# Altium PCB PCB2.PcbDoc
Units mm, origin at the board's own origin, x right, y up, seen from the top; angles counter-clockwise.
Board outline 30 x 30 mm, 2 copper layers (Top Layer, Bottom Layer); 23 components, 18 nets, 85 pads, 20 vias.
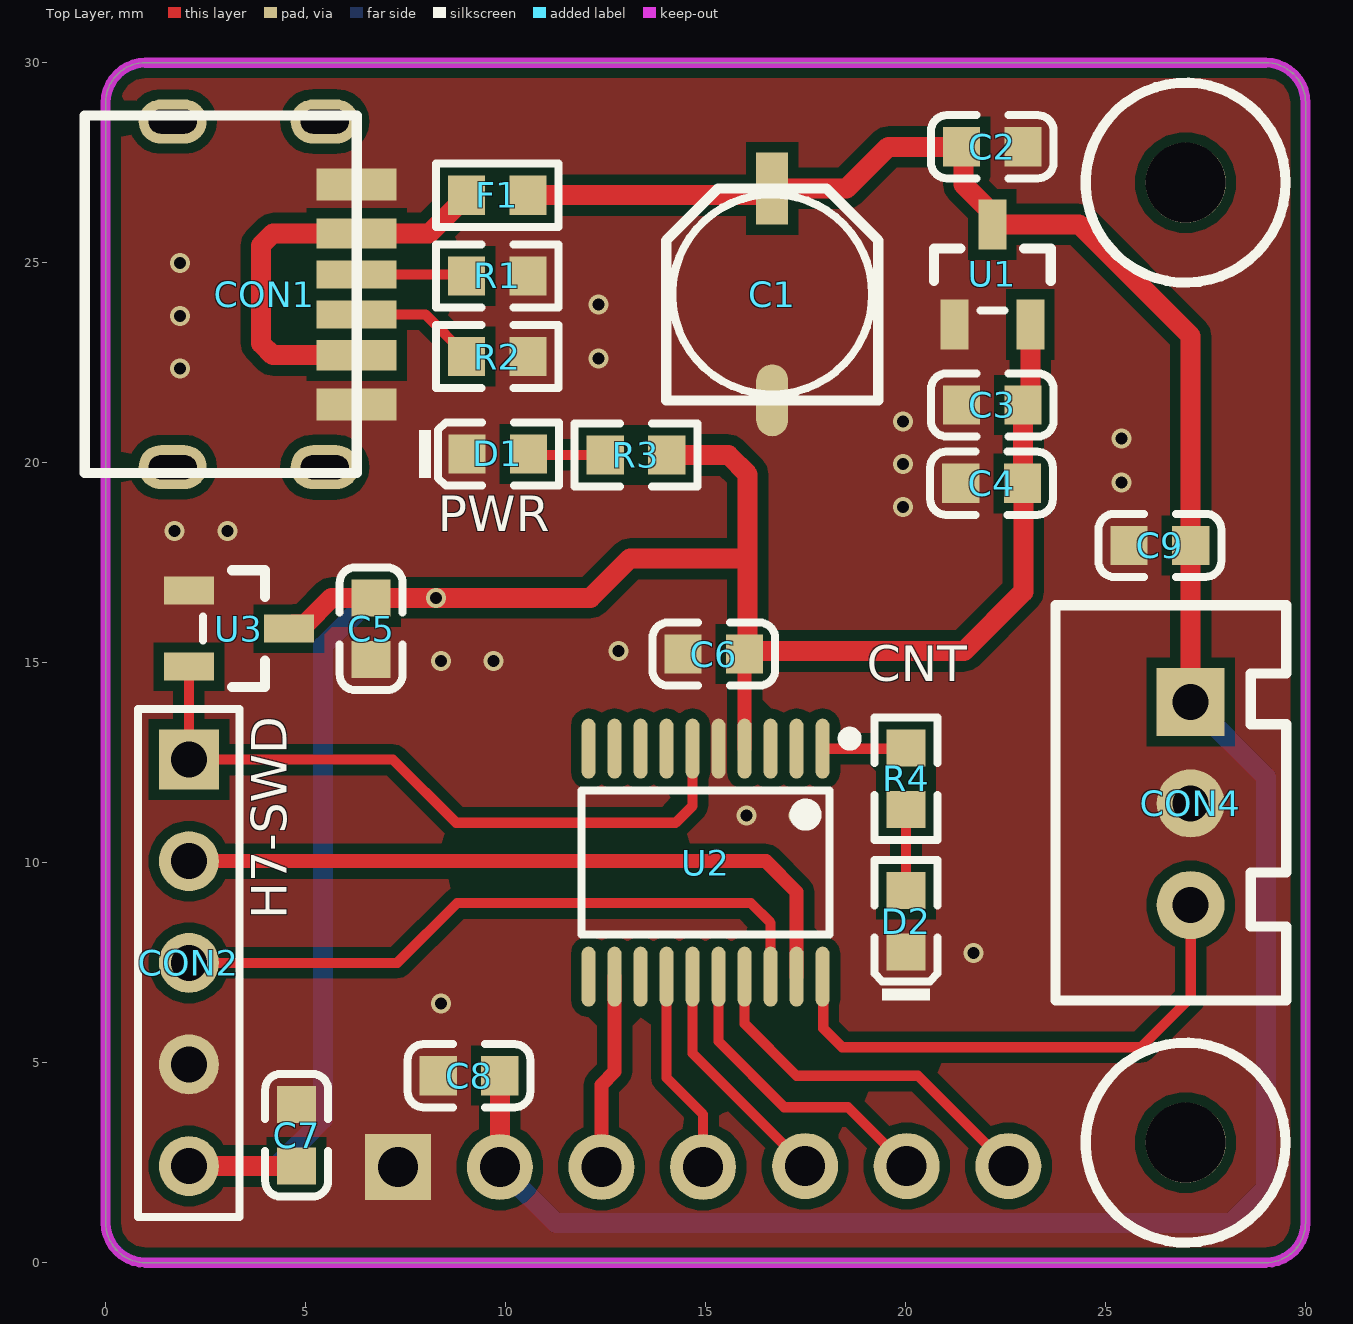
[diagram p0: Top Layer view]
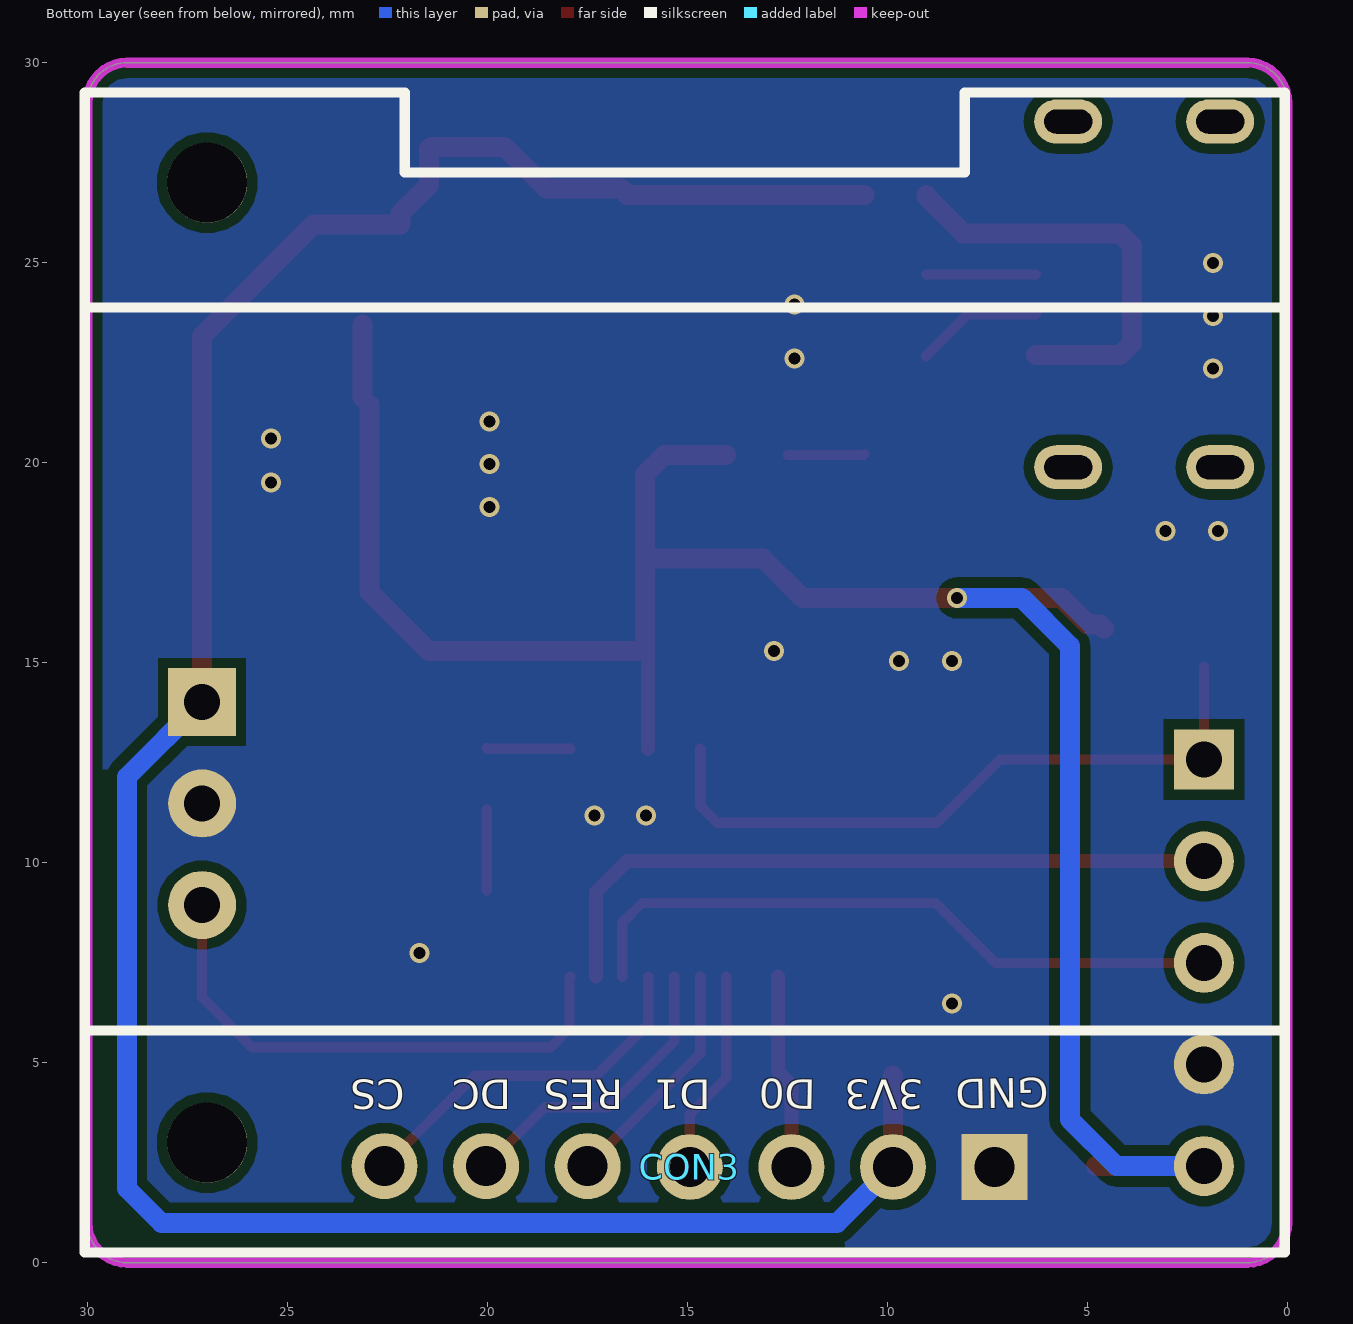
[diagram p1: Bottom Layer view, seen from below]
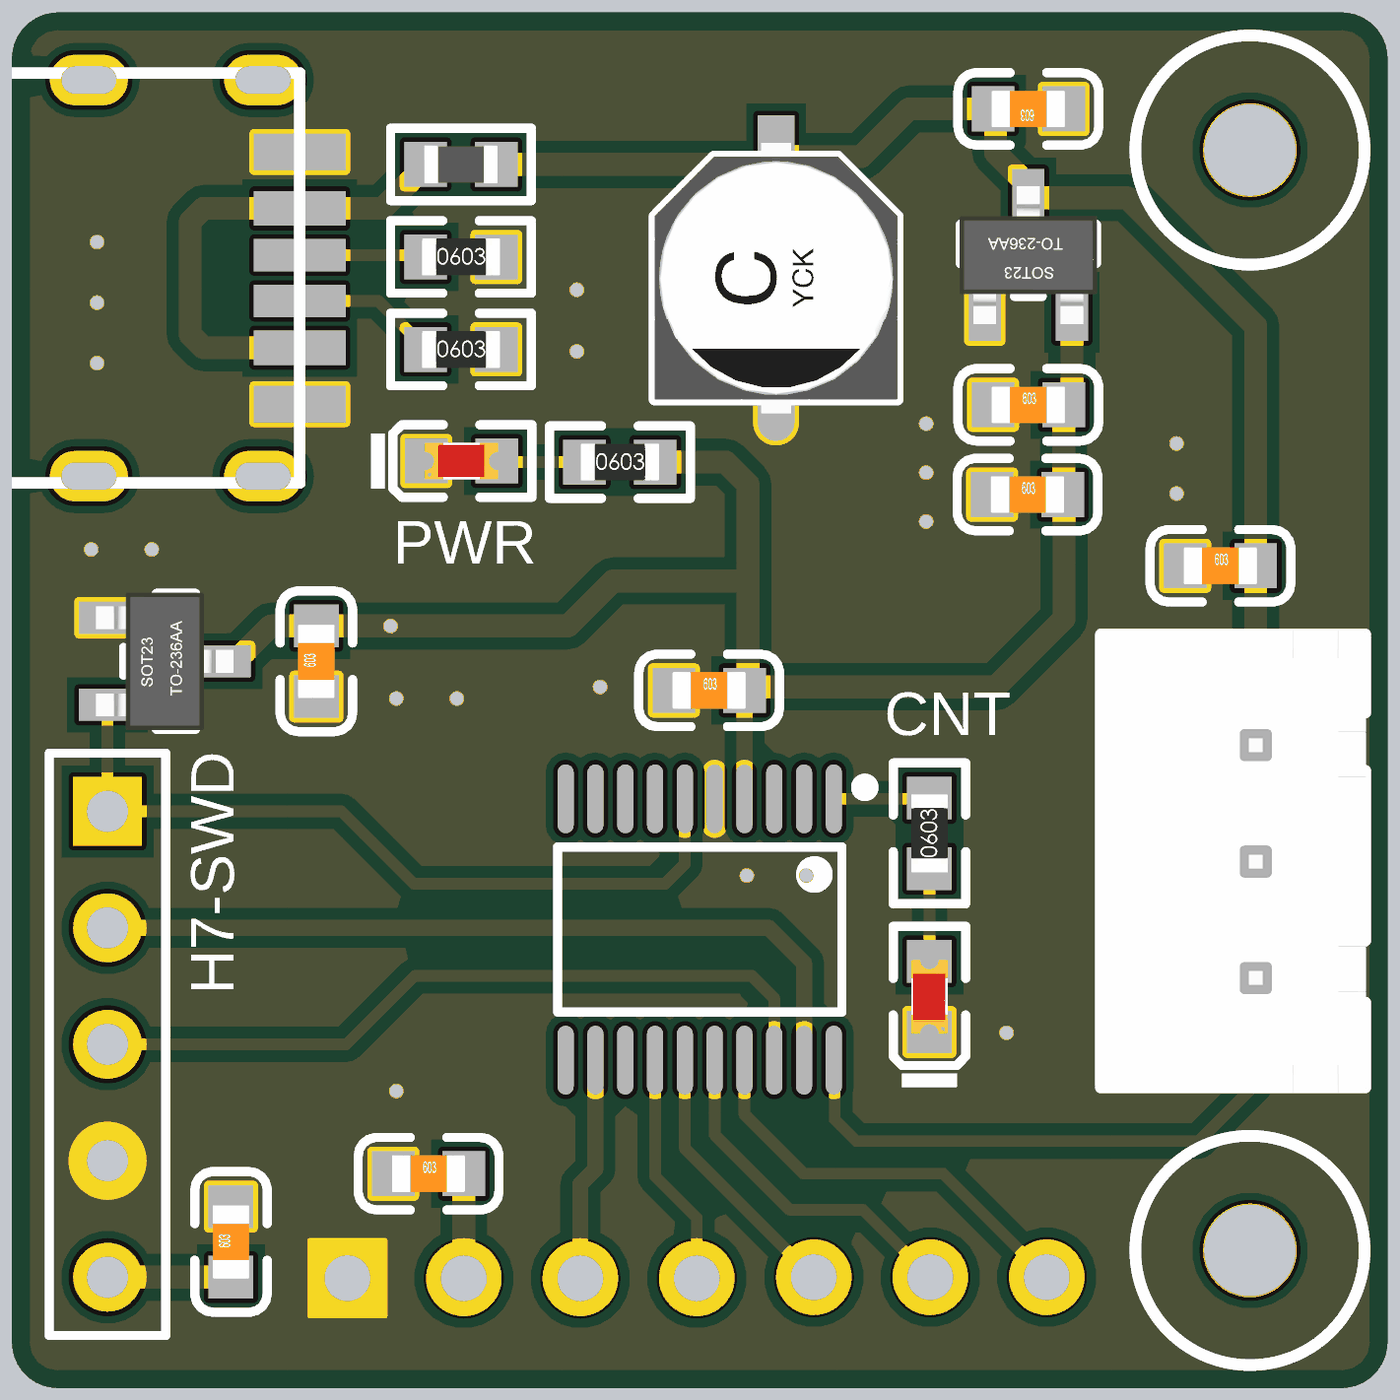
[diagram p2: 3D render of the assembled board from above, using the file's embedded part models]

## Layer stack, top to bottom
Top Solder: solder mask 0.0102, Solder Resist, Dk 3.5
Top Layer: signal copper 0.0356
Dielectric 1: dielectric 0.32, FR-4, Dk 4.8
Bottom Layer: signal copper 0.0356
Bottom Solder: solder mask 0.0102, Solder Resist, Dk 3.5

## Board outline
0,1 0,29 cw(c1,29) 1,30 29,30 cw(c29,29) 30,29 30,1 cw(c29,1) 29,0 1,0 cw(c1,1)

## Design rules (kind name [scope] priority, off if disabled: settings)
Clearance [All] p1: gap=0.254 ignorepadtopadclearanceinfootprint=FALSE except(0: Arc-Hole Track-Hole SMDPad-Hole THPad-Hole Via-Hole Fill-Hole Poly-Hole Region-Hole Text-Hole)
PolygonConnect [All] p1: connectstyle=Direct reliefconductorwidth=0.254 reliefentries=4 polygonreliefangle="90 Angle" airgapwidth=0.254
RoutingVias [All] p1: holewidth=0.711 width=1.27 viastyle="Through Hole" minholewidth=0.711 minwidth=1.27 maxholewidth=0.711 maxwidth=1.27
SolderMaskExpansion [All] p1: expansion=0.102 istentingtop=FALSE
Width [All] p1: maxlimit=1 minlimit=0.254 preferedwidth=0.254
30 further rules are at their usual default settings.

## Components (designator, comment, footprint, x,y, rotation, side; value= is the part's Value field where it differs from the comment)
C1 "Cap Pol1" "CM C(5*5.4)" 16.665,24.208 r90 top value=100uF/10V
C2 "1uF" 0603_C 22.167,27.898 r180 top
C3 "1uF" 0603_C 22.167,21.444 r0 top
C4 "0.1uF" 0603_C 22.149,19.485 r0 top
C5 "0.1uF" 0603_C 6.638,15.85 r90 top
C6 "0.1uF" 0603_C 15.205,15.215 r0 top
C7 "100nF" 0603_C 4.775,3.186 r90 top
C8 "0.1uF" 0603_C 9.085,4.674 r0 top
C9 "0.1uF" 0603_C 26.357,17.932 r0 top
CON1 "USB Type-C Charge" Type-C_4charge 6.276,24.208 r270 top
CON2 "H7-Tool SWD" hdr1x5 2.083,12.576 r270 top
CON3 "OLED 7Pin" "0.96 OLED SPI" 15.062,14.757 r0 bottom locked
CON4 "HDR1x3" XH2.54-LI-3P 27.127,11.481 r270 top
D1 "LED" 0603_LED_S1 9.804,20.218 r0 top
D2 "LED" 0603_LED_S1 20.01,8.534 r90 top
F1 "6V/0.5A" 0603_L 9.792,26.687 r0 top
R1 "5.1K" 0603_R 9.792,24.669 r0 top
R2 "5.1K" 0603_R 9.792,22.651 r0 top
R3 "10K" 0603_R 13.259,20.193 r0 top
R4 "10K" 0603_R 20.01,12.097 r90 top
U1 "SC662K-3.3V" SOT-23(SOT-23-3) 22.167,24.708 r270 top
U2 "STM32G030F6P6" TSSOP-20 15,10 r180 top
U3 "MAX809T" SOT-23(SOT-23-3) 3.333,15.85 r180 top

## Footprints (in the part's own frame and the unit in brackets; to place one, negate y for a bottom-side part, rotate by r counter-clockwise, add the part's x,y. Pads: shape width x height; smd on the part's side, far side on the other; paste and mask are expansions set on the pad)
"0.96 OLED SPI" [mm]
  rect 1.65x1.65 hole 1 paste+0 mask+0.051: 1(-7.747,12.363)
  round 1.65 hole 1 paste+0 mask+0.051: 2(-5.207,12.366) 3(-2.667,12.366) 4(-0.127,12.366) 5(2.426,12.342) 6(4.966,12.342) 7(7.506,12.342)
  silkscreen extent -15,-14.5 15,14.5
0603_C [mm]
  rect 0.93x0.98 smd: 1(-0.77,0) 2(0.77,0)
  silkscreen extent -1.53,-0.79 1.54,0.79, body extent -0.8,-0.4 0.8,0.4, height 0.3
0603_L [mm]
  rect 0.93x0.98 smd: 1(-0.77,0) 2(0.77,0)
  silkscreen extent -1.53,-0.79 1.54,0.79, body extent -0.82,-0.41 0.83,0.41, height 0.46
0603_LED_S1 [mm]
  rect 0.93x0.98 smd: A(0.77,0) K(-0.77,0)
  silkscreen extent -1.98,-0.79 1.54,0.79, body extent -0.8,-0.4 0.8,0.4, height 0.6
0603_R [mm]
  rect 0.93x0.98 smd: 1(-0.77,0) 2(0.77,0)
  silkscreen extent -1.53,-0.79 1.54,0.79, body extent -0.85,-0.4 0.85,0.4, height 0.56
"CM C(5*5.4)" [mm] "贴片电解电容，直径5mm，高5.4mm"
  rect 1.8x0.8 smd: 1(2.65,0)
  oval 1.8x0.8 smd: 2(-2.65,0)
  silkscreen extent -2.65,-2.65 2.65,2.65, body extent -2.95,-2.65 2.95,2.65, height 5.4
hdr1x5 [mm] "Connector; Header; 5 Position"
  rect 1.5x1.5 hole 0.9: 1(0,0)
  round 1.5 hole 0.9: 2(2.54,0) 3(5.08,0) 4(7.62,0) 5(10.16,0)
  silkscreen extent -1.27,-1.27 11.43,1.27
SOT-23(SOT-23-3) [mm]
  rect 1.25x0.7 smd: 1(1.25,-0.95) 2(1.25,0.95) 3(-1.25,0)
  silkscreen extent -0.65,-1.46 0.9,1.46, body extent -1.5,-1.5 1.5,1.5, height 1.3
TSSOP-20 [mm]
  oval 0.35x1.5 smd: 1(-2.925,-2.85) 2(-2.275,-2.85) 3(-1.625,-2.85) 4(-0.975,-2.85) 5(-0.325,-2.85) 6(0.325,-2.85) 7(0.975,-2.85) 8(1.625,-2.85) 9(2.275,-2.85) 10(2.925,-2.85) 11(2.925,2.85) 12(2.275,2.85) 13(1.625,2.85) 14(0.975,2.85) 15(0.325,2.85) 16(-0.325,2.85) 17(-0.975,2.85) 18(-1.625,2.85) 19(-2.275,2.85) 20(-2.925,2.85)
  silkscreen extent -3.75,-3.25 3.1,1.8
Type-C_4charge [mm]
  oval 1.1x1.7 hole 0.6 slot 1.2 at 90 deg: 0(-4.32,-0.8) 0(-4.32,-4.6) 0(4.32,-0.8) 0(4.32,-4.6)
  rect 0.7x2 smd: A5(-0.5,0) B5(0.5,0)
  rect 0.76x2 smd: A9(1.52,0) B9(-1.52,0)
  rect 0.8x2 smd: A12(2.75,0) B12(-2.75,0)
  silkscreen extent -4.47,-6.8 4.47,0
XH2.54-LI-3P [mm] "接插件，3P"
  rect 1.7x1.7 hole 0.9: 1(-2.54,0)
  round 1.7 hole 0.9: 2(0,0) 3(2.54,0)
  silkscreen extent -4.95,-3.38 4.93,2.39, body extent -5.04,-3.3 5.04,2.4, height 7.03

## Part data
C1: "Polarized Capacitor (Radial)", LatestRevisionDate=17-Jul-2002, LatestRevisionNote="Re-released for DXP Platform.", PackageDescription="Polarized Capacitor (Radial); 2 Leads", PackageReference=RB7.6-15, Published=8-Jun-2000, Publisher="Altium Limited"
C2 C3 C4 C5 C6 C7 C8 C9: library part "0603 100nF (104) 10% 50V", "贴片电容", Package=0603, SuppliersPartNumber=C14663, ComponentLink1Description=供应商链接, ComponentLink1URL=http://www.szlcsc.com/product/details_15331.html, Supplier=LC
D1 D2: library part Diode, "二极管", Package=SMA(DO-214AC), SuppliersPartNumber=C95872, ComponentLink1Description=供应商链接, ComponentLink1URL=http://www.szlcsc.com/product/details_2841.html, Notepad="1N4007 4007 编号C2464 已经停售, 使用新物料编号C95872", Supplier=LC
F1 R1 R2 R3 R4: library part RES, "Resistor"
U1: "Vinmax=6v;Ioutmax=250mA; 1.8V LDO"
U3: "3.08v"

## Free pads (board coordinates)
  round 2 hole 2: 8(27,3) 8(27,27)

## Via types
v1: diameter 0.5, hole 0.3, Top Layer to Bottom Layer, tented both sides, 20 vias

## Nets (pads, with @x,y where several pads share a name; then routed paths per layer and width w, separated by ;. In a path a pad name is that pad's centre, name@x,y a point inside that pad or via, vN(x,y) a via of type N, cw(c..) or ccw(c..) an arc to the next point about the centre after c; other vN are vias at no path point)
+3.3V: C3.2 C4.2 C5.2 C6.2 C7.1 CON2.5 R3.2 U1.2 U2.4 U3.3 | length 56.9
  Top Layer w0.35: U2.4 C6.2
  Top Layer w0.5: CON2.5 C7.1 ; U3.3 4.683,15.95 4.977,15.95 5.647,16.62 C5.2 v1(8.255,16.62) 12.124,16.62 13.106,17.602 16.053,17.602 ; R3.2 15.57,20.193 16.053,19.71 16.053,17.602 ; C4.2@22.937,19.431 C3.2 ; C4.2@22.944,19.46 22.944,16.772 21.465,15.292 16.053,15.292 16.053,17.602 ; C3.2@23.117,21.625 U1.2
  Bottom Layer w0.5: CON2.5 4.27,2.416 5.436,3.581 5.436,15.418 6.637,16.62 v1(8.255,16.62)
+5V: C1.1 C2.2 C8.2 C9.2 CON3.2 CON4.1 F1.2 U1.3 | length 64.2
  Top Layer w0.5: CON3.2 C8.2 ; F1.2 16.494,26.687 C1.1 18.527,26.858 19.567,27.898 C2.2 21.45,27.845 21.45,26.951 22.067,26.333 22.167,26.233 U1.3 24.334,25.958 27.127,23.165 C9.2 CON4.1
  Bottom Layer w0.5: CON3.2 11.256,0.991 28.143,0.991 29.007,1.854 29.007,12.141 CON4.1
CS: CON3.7 U2.17 | length 9.2
  Top Layer w0.254: U2.17 15.975,5.971 17.272,4.674 20.31,4.674 CON3.7
DC: CON3.6 U2.16 | length 7.6
  Top Layer w0.254: U2.16 15.325,5.528 16.967,3.886 18.558,3.886 CON3.6
GND: C1.2 C2.1 C3.1 C4.1 C5.1 C6.1 C7.2 C8.1 C9.1 CON1.A12 CON1.B12 CON2.4 CON3.1 CON4.2 D1.K D2.K R1.2 R2.2 U1.1 U2.5 U3.1
  other v1: 8.382,6.477 21.692,7.747 16.027,11.176 17.323,11.176 8.382,15.037 9.703,15.037 12.827,15.291 1.727,18.288 3.048,18.288 19.939,18.898 25.4,19.507 19.939,19.964 25.4,20.599 19.939,21.031 1.854,22.352 12.319,22.606 1.854,23.673 12.319,23.952 1.854,24.994
LED: R4.2 U2.1 | length 2.1
  Top Layer w0.254: U2.1 19.993,12.85 R4.2
MOSI: CON3.4 U2.14 | length 5.1
  Top Layer w0.254: U2.14 14.025,4.619 14.935,3.708 CON3.4
NetCON1_A5: CON1.A5 R1.1 | length 2.7
  Top Layer w0.254: CON1.A5 R1.1@9.022,24.708
NetCON1_A9: CON1.A9 CON1.B9 F1.1 | length 10.6
  Top Layer w0.5: CON1.A9 4.179,22.688 3.886,22.981 3.886,25.435 4.179,25.728 CON1.B9 8.088,25.728 9.022,26.662 F1.1
NetCON1_B5: CON1.B5 R2.1 | length 3.2
  Top Layer w0.254: CON1.B5 7.99,23.708 9.022,22.676 R2.1
NetD1_A: D1.A R3.1 | length 1.9
  Top Layer w0.254: D1.A 10.6,20.193 R3.1
NetD2_A: D2.A R4.1 | length 2
  Top Layer w0.254: D2.A R4.1
NRST: CON2.1 U2.6 U3.2 | length 17.2
  Top Layer w0.254: U3.2 CON2.1 7.185,12.576 8.763,10.998 14.249,10.998 14.675,11.424 U2.6
RST: CON3.5 U2.15 | length 5.9
  Top Layer w0.254: U2.15 14.675,5.229 CON3.5
SCK: CON3.3 U2.12 | length 4.9
  Top Layer w0.35: CON3.3 12.395,4.445 12.725,4.775 U2.12
SWCLK: CON2.2 U2.19 | length 17.6
  Top Layer w0.35: CON2.2 16.507,10.036 17.275,9.268 U2.19
SWDIO: CON2.3 U2.18 | length 16.7
  Top Layer w0.254: CON2.3 7.293,7.496 8.788,8.992 16.129,8.992 16.625,8.496 U2.18
TIM3_CH1: CON4.3 U2.20 | length 13.5
  Top Layer w0.254: U2.20 17.943,7.132 17.943,5.857 18.415,5.385 25.883,5.385 27.127,6.629 CON4.3
pads on no net: CON1.0 U2.2 U2.3 U2.7 U2.8 U2.9 U2.10 U2.11 U2.13

## Polygon pours and split planes (outlines as drawn)
GND on Bottom Layer "GND_L02_P000" (solid, remove dead copper, pour order 0): 31.247,31.733 -1.443,31.733 -1.443,-1.313 31.196,-1.313
GND on Top Layer "GND_L01_P001" (solid, remove dead copper, pour order 1): 31.247,31.733 -1.443,31.733 -1.443,-1.313 31.196,-1.313

## Keep-outs
Keep-Out Layer:
  the board outline again, w0.254

## Silkscreen, mask and mechanical layers (free items; w line width, h text height)
Top Overlay:
  circle w0.254: c27,3 r2.5
  circle w0.254: c27,27 r2.5
  text "PWR" at 8.306,17.983 h1.52
  text "CNT" at 19.025,14.241 h1.52
  text "H7-SWD" at 4.834,8.585 h1.52 r90

## Text inside footprints (layer, text, board x,y; h text height)
CON3: Bottom Overlay "CS" at 22.06,4.829 h1.27 r180; Bottom Overlay "DC" at 19.393,4.829 h1.27 r180; Bottom Overlay "RES" at 16.599,4.829 h1.27 r180; Bottom Overlay "D1" at 14.415,4.818 h1.27 r180; Bottom Overlay "D0" at 11.773,4.818 h1.27 r181; Bottom Overlay "3V3" at 9.081,4.818 h1.27 r180; Bottom Overlay "GND" at 5.971,4.871 h1.27 r179